# Altium PCB mdm3.PcbDoc (part 2 of 3)
Units mil, origin at the board's own origin, x right, y up, seen from the top; angles counter-clockwise.
Board outline 3925 x 3925 mil, 2 copper layers (TopLayer, BottomLayer); 80 components, 90 nets, 713 pads, 10 vias.
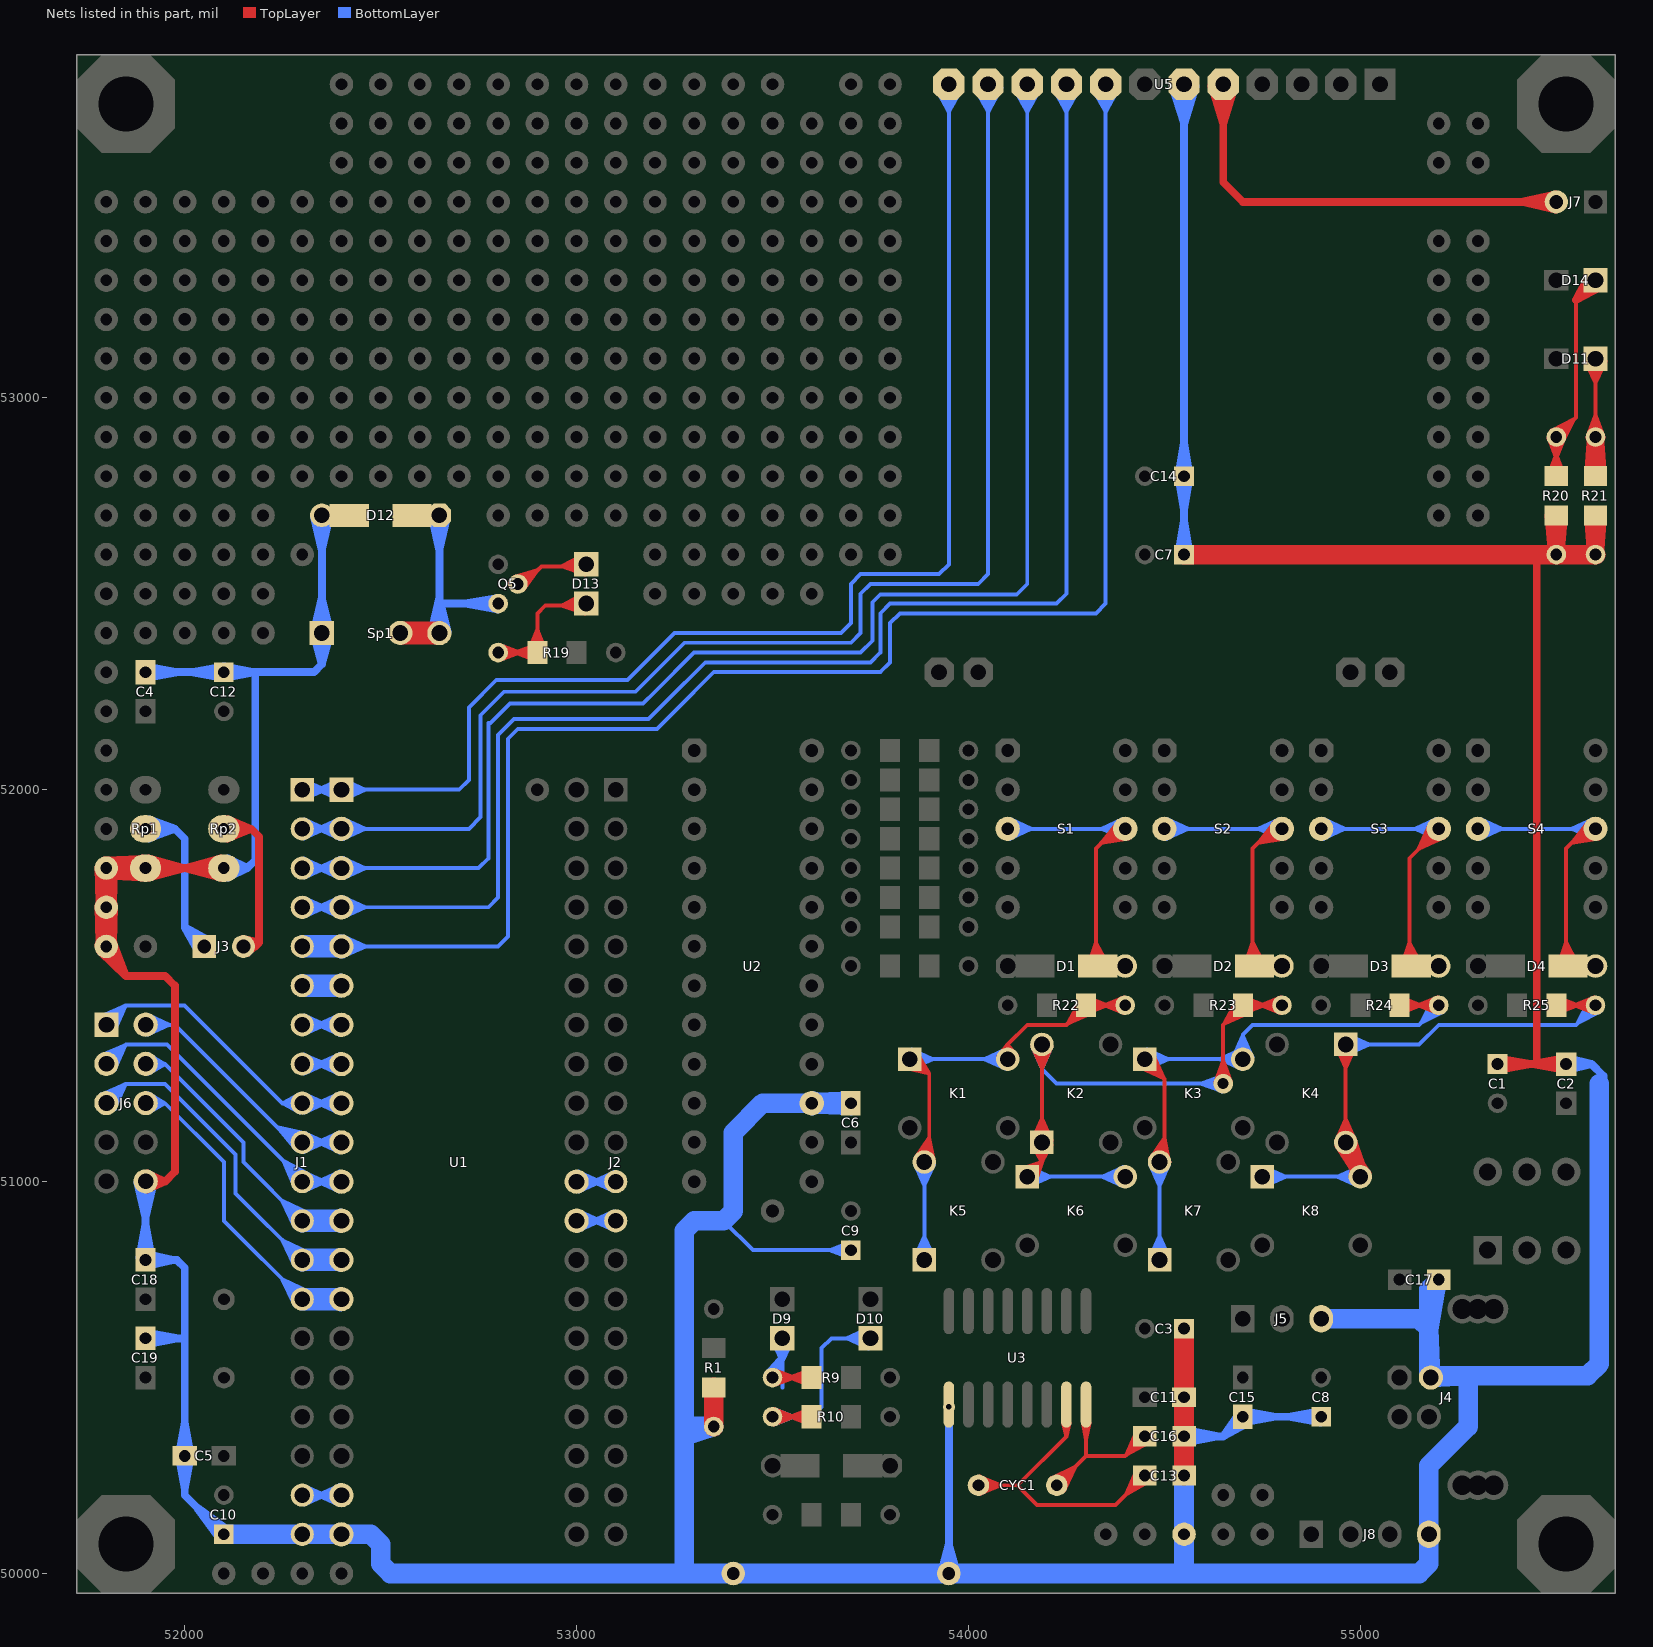
[diagram p2: the nets of this part, all layers, seen from the top]

## Via types
v1: diameter 30, hole 14, TopLayer to BottomLayer, 5 vias
v2: diameter 50, hole 28, TopLayer to BottomLayer, 5 vias

## Nets (pads, with @x,y where several pads share a name; then routed paths per layer and width w, separated by ;. In a path a pad name is that pad's centre, name@x,y a point inside that pad or via, vN(x,y) a via of type N, cw(c..) or ccw(c..) an arc to the next point about the centre after c; other vN are vias at no path point) (continued)
GND: C1.1 C2.2 C3.1 C4.2 C5.2 C6.2 C7.2 C8.1 C9.1 C10.1 C11.2 C12.1 C13.2 C14.1 C15.2 C16.2 C17.2 C18.2 C19.2 D12.2 D12.4 J1.20 J4.4 J5.3 J6.10 J8.4 pad.0@51800,51600 pad.0@53400,50000 pad.0@54550,50100 pad.1@51800,51700 pad.1@53950,50000 pad.2@51800,51800 R1.2 R1.4 R20.1 R20.3 R21.1 R21.3 Rp1.3 Rp2.3 Sp1.1 U1.20 U2.15 U3.1 U5.6 | length 29667.9
  TopLayer w20: pad.0@51780.12,51602.22 51800,51690 pad.0@51819.88,51602.22 ; pad.1@51780.12,51697.78 51800,51610 pad.1@51819.88,51697.78 ; pad.1@51780.08,51701.75 pad.0@51782.13,51611.09 ; pad.1@51780.12,51702.22 51800,51790 pad.1@51819.88,51702.22 ; pad.2@51780.12,51797.78 51800,51710 pad.2@51819.88,51797.78 ; pad.2@51780.08,51801.75 pad.1@51782.13,51711.09 ; pad.1@51780.95,51693.92 pad.0@51817.87,51611.09 ; pad.2@51780.95,51793.92 pad.1@51817.87,51711.09 ; pad.0@51784.69,51587.13 51850,51525 ; pad.2@51796.93,51780.24 51887.92,51776.24 pad.2@51807.31,51818.62 ; pad.2@51796.93,51819.76 51887.92,51823.76 pad.2@51807.31,51781.38 ; pad.0@51817.77,51609.18 51850,51525 ; pad.1@51819.05,51693.92 pad.0@51782.13,51611.09 ; pad.2@51819.05,51793.92 pad.1@51782.13,51711.09 ; pad.1@51819.92,51701.75 pad.0@51817.87,51611.09 ; pad.2@51819.92,51801.75 pad.1@51817.87,51711.09 ; Rp1.3@51891.71,51775.22 pad.2@51800,51800 ; Rp1.3@51891.71,51824.78 pad.2@51800,51800 ; Rp1.3@51895,51800 pad.2@51800,51800 ; J6.10@51900.29,51000.5 51950.5,51000.5 ; J6.10@51904.68,50979.96 51950.5,51000.5 ; J6.10@51904.68,51021.04 51950.5,51000.5 ; Rp1.3@51905,51800 52000,51800 ; Rp1.3@51908.29,51775.22 52000,51800 ; Rp1.3@51908.29,51824.78 52000,51800 ; 51975,51025 51950.5,51000.5 ; 51975,51030 51975,51500 51950,51525 51850,51525 ; Rp2.3@52091.71,51775.22 52000,51800 ; Rp2.3@52091.71,51824.78 52000,51800 ; Rp2.3@52095,51800 52000,51800 ; Rp2.3@52100,51800 Rp1.3@51900,51800 pad.2@51800,51800 ; C1.1@55351.32,51285.06 55435,51300 C1.1@55351.32,51314.94 ; 55375,51300 C1.1@55350,51300 C2.2@55525,51300 ; 55450,51300 55450,52600 ; R20.3@55480.47,52700.15 R20.1@55487.47,52614.83 ; R20.3@55484.47,52698.58 55500,52614.41 R20.3@55515.53,52698.58 ; R20.1@55485.06,52601.32 55500,52685 R20.1@55514.94,52601.32 ; R20.3@55488.63,52697.03 R20.1@55512.53,52614.83 ; R20.3@55496.06,52700 R20.1@55487.47,52614.83 ; R20.1@55500,52600 R20.3@55500,52700 ; R20.3@55503.94,52700 R20.1@55512.53,52614.83 ; R20.3@55511.37,52697.03 R20.1@55487.47,52614.83 ; R20.3@55519.53,52700.15 R20.1@55512.53,52614.83 ; C2.2@55523.51,51284.07 55439,51300 C2.2@55523.51,51315.93 ; R21.3@55580.47,52700.15 R21.1@55587.47,52614.83 ; R21.3@55584.47,52698.58 55600,52614.41 R21.3@55615.53,52698.58 ; R21.1@55585.06,52601.32 55600,52685 R21.1@55614.94,52601.32 ; R21.3@55588.63,52697.03 R21.1@55612.53,52614.83 ; R21.3@55596.06,52700 R21.1@55587.47,52614.83 ; R21.1@55600,52600 R21.3@55600,52700 ; R21.3@55603.94,52700 R21.1@55612.53,52614.83 ; R21.3@55611.37,52697.03 R21.1@55587.47,52614.83 ; R21.3@55619.53,52700.15 R21.1@55612.53,52614.83 ; pad.0@51782.13,51611.09 pad.1@51800,51700 ; pad.1@51782.13,51711.09 pad.2@51800,51800 ; pad.0@51800,51600 51850,51525 ; pad.0@51800,51600 pad.1@51800,51700 ; pad.0@51800,51600 51800,51575 51850,51525 ; pad.1@51800,51700 pad.0@51817.87,51611.09 ; pad.1@51800,51700 pad.2@51800,51800 ; pad.2@51800,51800 pad.1@51817.87,51711.09 ; Rp1.3@51890,51800 51802.22,51780.12 Rp1.3@51890,51800 ; Rp1.3@51890,51800 51802.22,51819.88 Rp1.3@51890,51800
  TopLayer w50: R1.2@53350,50375 R1.4@53350,50475 ; C13.2@54550,50250 C16.2@54550,50350 C11.2@54550,50450 C3.1@54550,50625 ; C7.2@54550,52600 R20.1@55500,52600 R21.1@55600,52600
  BottomLayer w10: 53375,50900 53450,50825 C9.1@53700,50825 ; C9.1@53696.36,50805.33 53645,50825 ; C9.1@53696.36,50844.67 53645,50825 ; C9.1@53699.09,50815.04 53645,50825 ; C9.1@53699.09,50834.96 53645,50825
  BottomLayer w20: J6.10@51879.42,50998.14 51900,50909.5 ; C18.2@51884.07,50805.49 51900,50890 ; C19.2@51900,50600 52000,50600 ; C18.2@51900,50804 51900,50890 ; J6.10@51900,51000 C18.2@51900,50800 51970,50800 ; C4.2@51900,52300 C12.1@52100,52300 52180,52300 ; J6.10@51900.29,51000.5 51900,50909.5 ; C4.2@51901.32,52285.06 51985,52300 C4.2@51901.32,52314.94 ; C19.2@51901.49,50584.07 51986,50600 C19.2@51901.49,50615.93 ; C18.2@51901.83,50784.1 51970,50800 ; C18.2@51901.83,50815.9 51970,50800 ; C18.2@51915.93,50805.49 51900,50890 ; J6.10@51921.14,50998.01 51900,50909.5 ; C5.2@51985.06,50298.68 52000,50215 C5.2@52014.94,50298.68 ; C5.2@51985.06,50301.32 52000,50385 C5.2@52014.94,50301.32 ; C10.1@52088.59,50090.26 52032.57,50167.43 ; C12.1@52098.68,52285.06 52015,52300 C12.1@52098.68,52314.94 ; Rp2.3@52100,51800 52160,51800 ; C12.1@52101.41,52285.07 52180,52300 ; C12.1@52101.41,52314.93 52180,52300 ; Rp2.3@52105,51800 52160,51800 ; C10.1@52109.74,50111.41 52032.57,50167.43 ; Rp2.3@52110.68,51775.65 52160,51800 ; Rp2.3@52110.68,51824.35 52160,51800 ; Sp1.1@52329.22,52402.07 52350,52490.67 ; Sp1.1@52329.27,52396.92 52350,52320 ; D12.2@52330.12,52697.78 52350,52610 ; D12.2@52369.88,52697.78 52350,52610 ; Sp1.1@52370.9,52396.88 52350,52320 ; Sp1.1@52370.94,52402.11 52350,52490.67 ; U2.15@53600,51200 C6.2@53700,51200 ; U2.15@53602.42,51179.14 53691,51200 U2.15@53602.42,51220.86 ; C6.2@53696.63,51191.38 U2.15@53616.18,51217.62 ; C6.2@53696.63,51208.62 U2.15@53616.18,51182.38 ; C6.2@53698.68,51185.06 53615,51200 C6.2@53698.68,51214.94 ; C6.2@53700,51194 U2.15@53616.18,51182.38 ; C6.2@53700,51206 U2.15@53616.18,51217.62 ; C6.2@53700.73,51179.02 U2.15@53616.18,51182.38 ; C6.2@53700.73,51220.98 U2.15@53616.18,51217.62 ; pad.1@53930.18,50002.67 53950,50075 ; pad.1@53950,50000 53950,50075 ; v1(53950,50425) 53950,50075 ; pad.1@53969.82,50002.67 53950,50075 ; U5.6@54520.34,53795.5 54550,53700 U5.6@54579.66,53795.5 ; C7.2@54535.06,52601.32 54550,52685 ; C14.1@54535.06,52798.68 54550,52715 C14.1@54564.94,52798.68 ; C14.1@54535.06,52801.32 54550,52885 C14.1@54564.94,52801.32 ; C16.2@54550,50350 54650,50350 ; U5.6@54550,53800 C7.2@54550,52600 54550,52685 ; C16.2@54554,50350 54640,50350 ; C16.2@54555.49,50334.07 54640,50350 ; C16.2@54555.49,50365.93 54640,50350 ; C7.2@54564.94,52601.32 54550,52685 ; C15.2@54688.89,50404.07 54650,50350 ; C15.2@54700,50394 54650,50350 ; C15.2@54701.32,50385.06 54785,50400 C15.2@54701.32,50414.94 ; C15.2@54708.58,50381.7 54650,50350 ; C8.1@54898.68,50385.06 54815,50400 C8.1@54898.68,50414.94 ; C8.1@54900,50400 C15.2@54700,50400 54650,50350 ; C2.2@55525,51300 55590,51300 ; C2.2@55526.97,51284.12 55590,51300 ; C2.2@55526.97,51315.88 55590,51300 ; 55610,51250 55620,51260 55620,51270 55590,51300 ; 51970,50800 51980,50800 52000,50780 52000,50600 ; 52000,50600 C5.2@52000,50300 52000,50200 C10.1@52100,50100 52032.57,50167.43 ; 52160,51800 52180,51820 52180,52300 ; 52180,52300 52330,52300 52350,52320 ; 52350,52320 Sp1.1@52350.09,52399.67 52350,52490.67 ; 52350,52320 D12.2@52350,52700 52350,52610
  BottomLayer w50: C10.1@52100,50100 J1.20@52300,50100 U1.20@52400,50100 52475,50100 52500,50075 52500,50025 52525,50000 53000,50000 ; 52875,50000 53000,50000 ; pad.0@53375,50000 53275,50000 ; C13.2@54550,50250 54550,50000 ; J5.3@54900,50650 55150,50650 55175,50625 ; J8.4@55175,50095 55175,50025 ; J8.4@55175,50105 55175,50275 ; C17.2@55196,50750 55175,50625 ; C17.2@55200,50750 55175,50725 55175,50625 ; 55610,51250 55610,50535 55580,50505 55275,50505 ; 53000,50000 53275,50000 ; 53275,50000 pad.0@53400,50000 ; 53275,50000 53275,50350 ; 53275,50000 pad.0@53400,50000 ; 53275,50350 R1.2@53350,50375 ; 53275,50350 53300,50375 ; 53275,50350 53275,50875 53300,50900 53375,50900 53400,50925 53400,51125 53475,51200 ; 53300,50375 R1.2@53350,50375 ; 53300,50375 R1.2@53350,50375 ; pad.0@53400,50000 pad.1@53950,50000 54550,50000 ; 53475,51200 U2.15@53600,51200 53475,51200 ; 54550,50000 55150,50000 55175,50025 ; 55175,50025 J8.4@55175,50100 55175,50275 ; 55175,50275 55275,50375 55275,50505 ; 55175,50625 J4.4@55180,50500 55275,50505 ; 55175,50625 55175,50505 55275,50505
LEDA: J7.2 U5.5 | length 1499.8
  TopLayer w20: U5.5@54620.34,53795.5 54650,53700 U5.5@54679.66,53795.5 ; U5.5@54650,53800 54650,53550 54700,53500 J7.2@55500,53500 ; J7.2@55497.87,53480.59 55410.47,53500 J7.2@55497.87,53519.41
NetC13_1: C13.1 CYC1.2 U3.7 | length 1390.7
  TopLayer w10: CYC1.2@54025.45,50225.14 54125,50225.14 ; CYC1.2@54026.81,50212.71 54082.95,50225.14 ; CYC1.2@54026.81,50237.57 54082.95,50225.14 ; CYC1.2@54029.85,50203.07 54082.95,50225.14 ; CYC1.2@54029.85,50247.21 54082.95,50225.14 ; U3.7@54241.56,50384.48 54250,50350 ; U3.7@54250,50385.5 54250,50350 ; U3.7@54250,50431 54250,50350 ; U3.7@54258.44,50384.48 54250,50350 ; C13.1@54428.39,50261.45 54402.79,50202.79 ; C13.1@54437.28,50256.7 54402.79,50202.79 ; C13.1@54446,50250 54402.79,50202.79 ; C13.1@54450,50250 54375,50175 54175,50175 54125,50225 54125,50225.14 ; C13.1@54453.45,50241.9 54402.79,50202.79 ; C13.1@54458.96,50233.47 54402.79,50202.79 ; 54125,50225.14 54125.14,50225.14 54250,50350
NetC16_1: C16.1 CYC1.1 U3.8 | length 1133.9
  TopLayer w10: CYC1.1@54212.35,50243.43 54274.16,50273.85 ; CYC1.1@54217.45,50234.74 54274.16,50273.85 ; CYC1.1@54225.59,50225 CYC1.1@54225.45,50225.14 54300,50299.69 ; CYC1.1@54235.05,50217.14 54274.16,50273.85 ; CYC1.1@54243.74,50212.04 54274.16,50273.85 ; U3.8@54291.54,50384.67 54300,50342 ; U3.8@54300,50385.5 54300,50342 ; U3.8@54300,50431 54300,50299.69 ; U3.8@54308.46,50384.67 54300,50342 ; C16.1@54428.39,50361.45 54402.79,50302.79 ; C16.1@54437.28,50356.7 54402.79,50302.79 ; C16.1@54446,50350 54402.79,50302.79 ; C16.1@54450,50350 54399.69,50299.69 54300,50299.69 ; C16.1@54453.45,50341.9 54402.79,50302.79 ; C16.1@54458.96,50333.47 54402.79,50302.79
NetD1_2: D1.2 D1.4 S1.3 S1.8 | length 2223.4
  TopLayer w10: D1.4@54305.66,51552.99 54325,51609.94 ; D1.4@54315.48,51550.55 54325,51609.94 ; D1.4@54325,51555 54325,51850 54375,51900 S1.8@54400,51900 54338.57,51863.57 ; D1.4@54330,51550 54325,51609.94 ; D1.4@54344.23,51552.95 54325,51609.94 ; D1.4@54353.51,51556.98 54325,51609.94 ; S1.8@54382.89,51919.58 54338.57,51863.57 ; S1.8@54390.35,51912.76 54338.57,51863.57 ; S1.8@54396.73,51905.03 54338.57,51863.57 ; S1.8@54402.84,51894.72 54338.57,51863.57 ; S1.8@54406.57,51885.41 54338.57,51863.57 ; S1.8@54408.97,51875.6 54338.57,51863.57
  BottomLayer w10: S1.3@54100,51900 S1.8@54400,51900 ; S1.3@54100.3,51894.01 54161,51900 ; S1.3@54100.3,51905.99 54161,51900 ; S1.3@54102.1,51884.14 54161,51900 ; S1.3@54102.1,51915.86 54161,51900 ; S1.3@54105.54,51874.6 54161,51900 ; S1.3@54105.54,51925.4 54161,51900 ; S1.8@54394.46,51874.6 54339,51900 ; S1.8@54394.46,51925.4 54339,51900 ; S1.8@54397.9,51884.14 54339,51900 ; S1.8@54397.9,51915.86 54339,51900 ; S1.8@54399.7,51894.01 54339,51900 ; S1.8@54399.7,51905.99 54339,51900
NetD2_2: D2.2 D2.4 S2.3 S2.8 | length 2230.5
  TopLayer w10: D2.4@54705.66,51552.99 54725,51609.94 ; D2.4@54715.48,51550.55 54725,51609.94 ; D2.4@54744.23,51552.95 54725,51609.94 ; D2.4@54753.51,51556.98 54725,51609.94 ; S2.8@54782.89,51919.58 54738.57,51863.57 ; S2.8@54790.35,51912.76 54738.57,51863.57 ; S2.8@54796.73,51905.03 54738.57,51863.57 ; S2.8@54802.84,51894.72 54738.57,51863.57 ; S2.8@54806.57,51885.41 54738.57,51863.57 ; S2.8@54808.97,51875.6 54738.57,51863.57 ; 54725,51609.94 D2.4@54730,51550 54725,51555 54725,51850 54775,51900 S2.8@54800,51900 54738.57,51863.57
  BottomLayer w10: S2.3@54500,51900 S2.8@54800,51900 ; S2.3@54500.3,51894.01 54561,51900 ; S2.3@54500.3,51905.99 54561,51900 ; S2.3@54502.1,51884.14 54561,51900 ; S2.3@54502.1,51915.86 54561,51900 ; S2.3@54505.54,51874.6 54561,51900 ; S2.3@54505.54,51925.4 54561,51900 ; S2.8@54794.46,51874.6 54739,51900 ; S2.8@54794.46,51925.4 54739,51900 ; S2.8@54797.9,51884.14 54739,51900 ; S2.8@54797.9,51915.86 54739,51900 ; S2.8@54799.7,51894.01 54739,51900 ; S2.8@54799.7,51905.99 54739,51900
NetD3_2: D3.2 D3.4 S3.3 S3.8 | length 3257.6
  TopLayer w10: D3.4@55105.66,51552.99 55125,51609.93 ; D3.4@55115.48,51550.55 55125,51609.93 ; D3.4@55125,51555 55125,51825 S3.8@55200,51900 55147.79,51847.79 ; D3.4@55130,51550 55125,51609.93 ; D3.4@55144.23,51552.95 55125,51609.93 ; D3.4@55153.51,51556.98 55125,51609.93 ; S3.8@55178.67,51914.86 55147.79,51847.79 ; S3.8@55187.53,51910.02 55147.79,51847.79 ; S3.8@55195.59,51904.07 55147.79,51847.79 ; S3.8@55204.07,51895.59 55147.79,51847.79 ; S3.8@55210.02,51887.53 55147.79,51847.79 ; S3.8@55214.86,51878.67 55147.79,51847.79
  BottomLayer w10: 54961,51900 54900.3,51894.01 54961,51900 ; 54961,51900 54900.3,51905.99 54961,51900 ; 54961,51900 54902.1,51884.14 54961,51900 ; 54961,51900 54902.1,51915.86 54961,51900 ; 54961,51900 54905.54,51874.6 54961,51900 ; 54961,51900 54905.54,51925.4 54961,51900 ; 55139,51900 55199.7,51905.99 55139,51900 ; 55139,51900 55199.7,51894.01 55139,51900 ; 55139,51900 55197.9,51915.86 55139,51900 ; 55139,51900 55197.9,51884.14 55139,51900 ; 55139,51900 55194.46,51925.4 55139,51900 ; 55139,51900 55194.46,51874.6 55139,51900 ; S3.3@54900,51900 S3.8@55200,51900 S3.3@54900,51900
NetD4_2: D4.2 D4.4 S4.3 S4.8 | length 2205.5
  TopLayer w10: D4.4@55505.66,51552.99 55525,51609.94 ; D4.4@55515.48,51550.55 55525,51609.94 ; D4.4@55544.23,51552.95 55525,51609.94 ; D4.4@55553.51,51556.98 55525,51609.94 ; S4.8@55575,51900 55525,51850 55525,51555 D4.4@55530,51550 55525,51609.94 ; S4.8@55582.89,51919.58 55538.57,51863.57 ; S4.8@55590.35,51912.76 55538.57,51863.57 ; S4.8@55596.73,51905.03 55538.57,51863.57 ; S4.8@55600,51900 55538.57,51863.57 ; S4.8@55602.84,51894.72 55538.57,51863.57 ; S4.8@55606.57,51885.41 55538.57,51863.57 ; S4.8@55608.97,51875.6 55538.57,51863.57
  BottomLayer w10: S4.3@55300,51900 S4.8@55600,51900 ; S4.3@55300.3,51894.01 55361,51900 ; S4.3@55300.3,51905.99 55361,51900 ; S4.3@55302.1,51884.14 55361,51900 ; S4.3@55302.1,51915.86 55361,51900 ; S4.3@55305.54,51874.6 55361,51900 ; S4.3@55305.54,51925.4 55361,51900 ; S4.8@55594.46,51874.6 55539,51900 ; S4.8@55594.46,51925.4 55539,51900 ; S4.8@55597.9,51884.14 55539,51900 ; S4.8@55597.9,51915.86 55539,51900 ; S4.8@55599.7,51894.01 55539,51900 ; S4.8@55599.7,51905.99 55539,51900
NetD9_2: D9.2 R9.1 R9.3 | length 1351
  TopLayer w10: R9.1@53500,50500 R9.3@53600,50500 ; R9.1@53500.91,50490.04 53555,50500 ; R9.1@53500.91,50509.96 53555,50500 ; R9.1@53503.64,50480.33 53555,50500 ; R9.1@53503.64,50519.67 53555,50500 ; R9.3@53596.19,50479.77 53544.41,50500 ; R9.3@53596.19,50520.23 53544.41,50500 ; R9.3@53598.99,50489.46 53544.41,50500 ; R9.3@53598.99,50510.54 53544.41,50500
  BottomLayer w10: R9.1@53483.08,50510.67 53525,50558.4 ; R9.1@53491.15,50504.65 53525,50558.4 ; D9.2@53499.6,50594.46 53525,50539 ; R9.1@53500,50500 53525,50558.4 ; D9.2@53509.14,50597.9 53525,50539 ; R9.1@53509.47,50496.8 53525,50558.4 ; D9.2@53519.01,50599.7 53525,50539 ; R9.1@53519.4,50495.12 53525,50558.4 ; 53525,50475 D9.2@53525,50600 ; D9.2@53530.99,50599.7 53525,50539 ; D9.2@53540.86,50597.9 53525,50539 ; D9.2@53550.4,50594.46 53525,50539
NetD10_2: D10.2 R10.2 R10.4 | length 1549.1
  TopLayer w10: R10.2@53500,50400 R10.4@53600,50400 ; R10.2@53500.91,50390.04 53555,50400 ; R10.2@53500.91,50409.96 53555,50400 ; R10.2@53503.64,50380.33 53555,50400 ; R10.2@53503.64,50419.67 53555,50400 ; R10.4@53596.19,50379.77 53544.41,50400 ; R10.4@53596.19,50420.23 53544.41,50400 ; R10.4@53598.99,50389.46 53544.41,50400 ; R10.4@53598.99,50410.54 53544.41,50400
  BottomLayer w10: R10.2@53500,50400 53600,50400 53625,50425 53625,50575 53650,50600 D10.2@53750,50600 ; R10.2@53500.91,50390.04 53555,50400 ; R10.2@53500.91,50409.96 53555,50400 ; R10.2@53503.64,50380.33 53555,50400 ; R10.2@53503.64,50419.67 53555,50400 ; D10.2@53744.46,50574.6 53689,50600 ; D10.2@53744.46,50625.4 53689,50600 ; D10.2@53747.9,50584.14 53689,50600 ; D10.2@53747.9,50615.86 53689,50600 ; D10.2@53749.7,50594.01 53689,50600 ; D10.2@53749.7,50605.99 53689,50600
NetD11_2: D11.2 R21.2 R21.4 | length 1740.8
  TopLayer w10: D11.2@55574.6,53094.46 55600,53039 ; R21.2@55580.33,52903.64 55600,52955 ; D11.2@55584.14,53097.9 55600,53039 ; R21.2@55590.04,52900.91 55600,52955 ; D11.2@55594.01,53099.7 55600,53039 ; R21.2@55600,52900 D11.2@55600,53100 ; D11.2@55605.99,53099.7 55600,53039 ; R21.2@55609.96,52900.91 55600,52955 ; D11.2@55615.86,53097.9 55600,53039 ; R21.2@55619.67,52903.64 55600,52955 ; D11.2@55625.4,53094.46 55600,53039
  TopLayer w20: R21.4@55580.47,52799.85 R21.2@55587.47,52885.17 ; R21.4@55584.47,52801.42 55600,52885.59 R21.4@55615.53,52801.42 ; R21.2@55585.06,52898.68 55600,52815 R21.2@55614.94,52898.68 ; R21.4@55588.63,52802.97 R21.2@55612.53,52885.17 ; R21.4@55596.06,52800 R21.2@55587.47,52885.17 ; R21.4@55600,52800 R21.2@55600,52900 ; R21.4@55603.94,52800 R21.2@55612.53,52885.17 ; R21.4@55611.37,52802.97 R21.2@55587.47,52885.17 ; R21.4@55619.53,52799.85 R21.2@55612.53,52885.17
NetD12_1: D12.1 D12.3 Q5.3 Sp1.2 Sp1.3 | length 2447.2
  TopLayer w20: Sp1.2@52552.35,52379.13 Sp1.3@52641,52399.67 ; Sp1.2@52552.5,52420.85 Sp1.3@52641,52399.67 ; Sp1.3@52643.35,52379.78 Sp1.2@52560.35,52418.97 ; Sp1.3@52643.48,52419.6 Sp1.2@52560.28,52380.97 ; Sp1.3@52647.6,52378.82 Sp1.2@52559.09,52399.97 ; Sp1.3@52647.66,52378.81 52559.09,52399.67 Sp1.3@52647.66,52420.53 ; Sp1.3@52647.73,52420.54 Sp1.2@52559.09,52399.97 ; D12.1@52650,52700 D12.1@52650.09,52699.91 ; Sp1.3@52651.99,52378.76 Sp1.2@52560.28,52380.97 ; Sp1.3@52652.13,52420.57 Sp1.2@52560.35,52418.97 ; Sp1.2@52559.09,52399.97 Sp1.3@52650.09,52399.67 ; Sp1.2@52560.28,52380.97 Sp1.3@52650.09,52399.67 ; Sp1.2@52560.35,52418.97 Sp1.3@52650.09,52399.67 ; Sp1.3@52641,52399.67 Sp1.2@52550,52400 52550.33,52399.67 Sp1.3@52650.09,52399.67
  BottomLayer w20: Sp1.3@52629.22,52402.07 52650,52490.67 ; D12.1@52630.12,52697.78 52650,52610 D12.1@52669.88,52697.78 ; Sp1.3@52650,52399.76 D12.1@52650,52700 ; Sp1.3@52650.09,52399.67 52650,52490.67 ; 52655,52475 Q5.3@52800,52475 ; Sp1.3@52670.94,52402.11 52650,52490.67 ; Q5.3@52798.68,52460.06 52715,52475 Q5.3@52798.68,52489.94
NetD13_1: D13.1 Q5.2 | length 947.9
  TopLayer w10: Q5.2@52841.16,52542.94 52901.56,52561.56 ; Q5.2@52844.88,52533.59 52901.56,52561.56 ; Q5.2@52850,52525 52901.56,52561.56 ; Q5.2@52856.41,52517.33 52901.56,52561.56 ; Q5.2@52864,52510.72 52901.56,52561.56 ; Q5.2@52870,52530 52910,52570 52995,52570 D13.1@53025,52600 ; D13.1@53017.74,52599.97 52961.21,52570 ; D13.1@53021.72,52549.21 52961.21,52570 ; D13.1@53021.77,52590.67 52961.21,52570 ; D13.1@53024.25,52559.02 52961.21,52570 ; D13.1@53024.25,52580.95 52961.21,52570 ; D13.1@53025,52575 52961.21,52570 ; D13.1@53025.19,52569 52961.21,52570
NetD13_2: D13.2 R19.1 R19.3 | length 1488
  TopLayer w10: R19.1@52800,52350 R19.3@52900,52350 ; R19.1@52800.91,52340.04 52855,52350 ; R19.1@52800.91,52359.96 52855,52350 ; R19.1@52803.64,52330.33 52855,52350 ; R19.1@52803.64,52369.67 52855,52350 ; R19.3@52879.77,52357.75 52900,52409.53 ; R19.3@52889.46,52354.95 52900,52409.53 ; R19.3@52896.19,52329.77 52844.41,52350 ; R19.3@52896.19,52370.23 52844.41,52350 ; R19.3@52898.99,52339.46 52844.41,52350 ; R19.3@52898.99,52360.54 52844.41,52350 ; R19.3@52900,52353.94 52900,52409.53 ; R19.3@52900,52375 52900,52450 52920,52470 52995,52470 D13.2@53025,52500 ; R19.3@52910.54,52354.95 52900,52409.53 ; R19.3@52920.23,52357.75 52900,52409.53 ; D13.2@53017.73,52499.96 52961.34,52470 ; D13.2@53021.72,52449.21 52961.34,52470 ; D13.2@53021.76,52490.67 52961.34,52470 ; D13.2@53024.24,52459.02 52961.34,52470 ; D13.2@53024.25,52480.95 52961.34,52470 ; D13.2@53025,52475 52961.34,52470 ; D13.2@53025.19,52469 52961.34,52470
NetD14_2: D14.2 R20.2 R20.4 | length 1457.3
  TopLayer w10: R20.4@55479.77,52803.81 55500,52855.59 ; R20.2@55480.33,52896.36 55500,52845 ; R20.2@55488.19,52916.14 55546.21,52946.21 ; R20.4@55489.46,52801.01 55500,52855.59 ; R20.2@55490.04,52899.09 55500,52845 ; R20.2@55493.49,52907.59 55546.21,52946.21 ; R20.4@55500,52800 R20.2@55500,52900 55550,52950 55550,53250 ; R20.2@55507.59,52893.49 55546.21,52946.21 ; R20.2@55509.96,52899.09 55500,52845 ; R20.4@55510.54,52801.01 55500,52855.59 ; R20.2@55516.14,52888.19 55546.21,52946.21 ; R20.2@55519.67,52896.36 55500,52845 ; R20.4@55520.23,52803.81 55500,52855.59
  TopLayer w20: D14.2@55583.11,53312.48 55550,53250 ; D14.2@55612.48,53283.11 55550,53250 ; 55550,53250 D14.2@55600,53300 55550,53250
NetJ1_19: J1.19 U1.19 | length 704.1
  BottomLayer w10: J1.19@52300,50200 U1.19@52400,50200 ; J1.19@52301.77,50185.58 52359.53,50200 ; J1.19@52301.77,50214.42 52359.53,50200 ; J1.19@52305.05,50176 52359.53,50200 ; J1.19@52305.05,50224 52359.53,50200 ; U1.19@52394.46,50174.6 52339,50200 ; U1.19@52394.46,50225.4 52339,50200 ; U1.19@52397.9,50184.14 52339,50200 ; U1.19@52397.9,50215.86 52339,50200 ; U1.19@52399.7,50194.01 52339,50200 ; U1.19@52399.7,50205.99 52339,50200
NetJ2_11: J2.11 U1.30 | length 704.1
  BottomLayer w10: U1.30@53000,51000 J2.11@53100,51000 ; U1.30@53000.3,50994.01 53061,51000 ; U1.30@53000.3,51005.99 53061,51000 ; U1.30@53002.1,50984.14 53061,51000 ; U1.30@53002.1,51015.86 53061,51000 ; U1.30@53005.54,50974.6 53061,51000 ; U1.30@53005.54,51025.4 53061,51000 ; J2.11@53094.95,50976 53040.47,51000 ; J2.11@53094.95,51024 53040.47,51000 ; J2.11@53098.23,50985.58 53040.47,51000 ; J2.11@53098.23,51014.42 53040.47,51000
NetJ2_12: J2.12 U1.29 | length 704.1
  BottomLayer w10: U1.29@53000,50900 J2.12@53100,50900 ; U1.29@53000.3,50894.01 53061,50900 ; U1.29@53000.3,50905.99 53061,50900 ; U1.29@53002.1,50884.14 53061,50900 ; U1.29@53002.1,50915.86 53061,50900 ; U1.29@53005.54,50874.6 53061,50900 ; U1.29@53005.54,50925.4 53061,50900 ; J2.12@53094.95,50876 53040.47,50900 ; J2.12@53094.95,50924 53040.47,50900 ; J2.12@53098.23,50885.58 53040.47,50900 ; J2.12@53098.23,50914.42 53040.47,50900
NetJ3_1: J3.1 Rp1.2 | length 757.5
  BottomLayer w20: Rp1.2@51900,51900 51975,51900 ; Rp1.2@51905,51900 51975,51900 ; Rp1.2@51909.46,51875.4 51975,51900 ; Rp1.2@51909.46,51924.6 51975,51900 ; J3.1@52034.42,51588.23 52000,51650 ; J3.1@52050,51600 52000,51650 ; J3.1@52061.77,51615.58 52000,51650 ; 51975,51900 52000,51875 52000,51650
NetJ3_2: J3.2 Rp2.2 | length 701.1
  TopLayer w20: Rp2.2@52100,51900 52170,51900 ; Rp2.2@52105,51900 52170,51900 ; Rp2.2@52109.81,51875.47 52170,51900 ; Rp2.2@52109.81,51924.53 52170,51900 ; J3.2@52149.88,51619.53 52190,51610 ; J3.2@52150,51600 52190,51610 ; J3.2@52159.09,51582.72 52190,51610 ; 52180,51600 52190,51610 ; 52170,51900 52190,51880 52190,51610
NetK1_1: K1.1 K1.4 K5.1 K5.4 R22.2 R22.4 | length 3667.4
  TopLayer w10: K1.1@53839.3,51289.9 53900,51275 ; K1.1@53842.5,51299.51 53900,51275 ; K1.1@53860.38,51323.33 53900,51275 ; K5.4@53864.46,51059.7 53900,51111.9 ; K1.1@53868.7,51329.1 53900,51275 ; K5.4@53873.25,51054.69 53900,51111.9 ; K5.4@53887.5,51050 53900,51111.9 ; K5.4@53900,51050 53900,51275 ; K5.4@53902.45,51048.8 53900,51111.9 ; K5.4@53912.5,51050 53900,51111.9 ; K1.4@54076.43,51320.83 54100,51350 ; K1.4@54085.3,51315.5 54100,51350 ; K1.4@54100,51312.5 54100,51350 ; K1.4@54114.7,51315.5 54100,51350 ; K1.4@54123.57,51320.83 54100,51350 ; R22.4@54283.81,51458.79 54253.2,51403.2 ; R22.4@54292.22,51453.25 54253.2,51403.2 ; R22.4@54300,51446.06 54253.2,51403.2 ; R22.4@54301.01,51439.46 54355.59,51450 ; R22.4@54301.01,51460.54 54355.59,51450 ; R22.4@54303.81,51429.77 54355.59,51450 ; R22.4@54303.81,51470.23 54355.59,51450 ; R22.4@54306.48,51437.68 54253.2,51403.2 ; R22.4@54311.26,51428.82 54253.2,51403.2 ; R22.2@54396.36,51430.33 54345,51450 ; R22.2@54396.36,51469.67 54345,51450 ; R22.2@54399.09,51440.04 54345,51450 ; R22.2@54399.09,51459.96 54345,51450 ; R22.2@54400,51450 R22.4@54300,51450 54250,51400 54150,51400 54100,51350 ; 53900,51275 K1.1@53850,51312.5 53862.5,51312.5 53900,51275
  BottomLayer w10: K1.1@53850,51312.5 K1.4@54100,51312.5 ; K1.1@53851.88,51297.62 53910,51312.5 ; K1.1@53851.88,51327.38 53910,51312.5 ; K1.1@53855.21,51288.05 53910,51312.5 ; K1.1@53855.21,51336.95 53910,51312.5 ; K5.1@53863.05,50805.21 53887.5,50860 ; K5.4@53863.05,51044.79 53887.5,50990 ; K5.1@53872.62,50801.88 53887.5,50860 ; K5.4@53872.62,51048.12 53887.5,50990 ; K5.1@53887.5,50800 K5.4@53887.5,51050 ; K5.1@53902.38,50801.88 53887.5,50860 ; K5.4@53902.38,51048.12 53887.5,50990 ; K5.1@53911.95,50805.21 53887.5,50860 ; K5.4@53911.95,51044.79 53887.5,50990 ; K1.4@54094.79,51288.05 54040,51312.5 ; K1.4@54094.79,51336.95 54040,51312.5 ; K1.4@54098.12,51297.62 54040,51312.5 ; K1.4@54098.12,51327.38 54040,51312.5
NetK2_1: K2.1 K2.4 K6.1 K6.4 R23.2 R23.4 | length 4308.1
  TopLayer w10: K6.1@54136.99,51033.85 54187.5,51050 ; K6.1@54141,51024.5 54187.5,51050 ; K6.1@54150,51012.5 54187.5,51050 ; K6.1@54162,51003.5 54187.5,51050 ; K2.1@54163.05,51105.21 54187.5,51160 ; K2.4@54163.05,51344.79 54187.5,51290 ; K2.1@54163.29,51093.75 54187.5,51050 ; K6.1@54171.35,50999.49 54187.5,51050 ; K2.1@54172.62,51101.88 54187.5,51160 ; K2.4@54172.62,51348.12 54187.5,51290 ; K2.1@54172.67,51097.75 54187.5,51050 ; K2.4@54187.5,51350 K2.1@54187.5,51100 54187.5,51050 ; K2.1@54202.33,51097.75 54187.5,51050 ; K2.1@54202.38,51101.88 54187.5,51160 ; K2.4@54202.38,51348.12 54187.5,51290 ; K2.1@54211.71,51093.75 54187.5,51050 ; K2.1@54211.95,51105.21 54187.5,51160 ; K2.4@54211.95,51344.79 54187.5,51290 ; v2@54630.29,51253.39 54650,51309 ; v2@54640.04,51250.85 54650,51309 ; v2(54650,51250) 54650,51400 R23.4@54700,51450 R23.2@54800,51450 ; v2@54659.96,51250.85 54650,51309 ; v2@54669.71,51253.39 54650,51309 ; R23.4@54683.81,51458.79 54653.2,51403.2 ; R23.4@54692.22,51453.25 54653.2,51403.2 ; R23.4@54700,51446.06 54653.2,51403.2 ; R23.4@54701.01,51439.46 54755.59,51450 ; R23.4@54701.01,51460.54 54755.59,51450 ; R23.4@54703.81,51429.77 54755.59,51450 ; R23.4@54703.81,51470.23 54755.59,51450 ; R23.4@54706.48,51437.68 54653.2,51403.2 ; R23.4@54711.26,51428.82 54653.2,51403.2 ; R23.2@54796.36,51430.33 54745,51450 ; R23.2@54796.36,51469.67 54745,51450 ; R23.2@54799.09,51440.04 54745,51450 ; R23.2@54799.09,51459.96 54745,51450
  BottomLayer w10: K6.1@54150,51012.5 K6.4@54400,51012.5 ; K6.1@54151.88,50997.62 54210,51012.5 ; K6.1@54151.88,51027.38 54210,51012.5 ; K6.1@54155.21,50988.05 54210,51012.5 ; K6.1@54155.21,51036.95 54210,51012.5 ; K2.4@54163.05,51344.79 54187.5,51290 ; K2.4@54172.62,51348.12 54187.5,51290 ; K2.4@54187.5,51350 54187.5,51287.5 54225,51250 v2(54650,51250) ; K2.4@54202.38,51348.12 54187.5,51290 ; K2.4@54211.95,51344.79 54187.5,51290 ; K6.4@54394.79,50988.05 54340,51012.5 ; K6.4@54394.79,51036.95 54340,51012.5 ; K6.4@54398.12,50997.62 54340,51012.5 ; K6.4@54398.12,51027.38 54340,51012.5 ; v2@54646.61,51230.29 54591,51250 ; v2@54646.61,51269.71 54591,51250 ; v2@54649.15,51240.04 54591,51250 ; v2@54649.15,51259.96 54591,51250
NetK3_1: K3.1 K3.4 K7.1 K7.4 R24.2 R24.4 | length 4048.1
  TopLayer w10: K3.1@54435.73,51291.98 54500,51262.5 ; K3.1@54440.58,51300.83 54500,51262.5 ; K3.1@54450,51312.5 54500,51262.5 ; K3.1@54461.67,51321.92 54500,51262.5 ; K7.4@54464.48,51059.74 54500,51111.61 ; K3.1@54470.52,51326.77 54500,51262.5 ; K7.4@54473.26,51054.71 54500,51111.61 ; K7.4@54487.5,51050 54500,51111.61 ; K7.4@54500,51045 54500,51262.5 ; K7.4@54502.45,51048.79 54500,51111.61 ; K7.4@54512.5,51050 54500,51111.61 ; R24.4@55100,51450 R24.2@55200,51450 ; R24.4@55101.01,51439.46 55155.59,51450 ; R24.4@55101.01,51460.54 55155.59,51450 ; R24.4@55103.81,51429.77 55155.59,51450 ; R24.4@55103.81,51470.23 55155.59,51450 ; R24.2@55196.36,51430.33 55145,51450 ; R24.2@55196.36,51469.67 55145,51450 ; R24.2@55199.09,51440.04 55145,51450 ; R24.2@55199.09,51459.96 55145,51450
  BottomLayer w10: K3.1@54450,51312.5 K3.4@54700,51312.5 54700,51375 54725,51400 55150,51400 R24.2@55200,51450 55153.79,51403.79 ; K3.1@54451.88,51297.62 54510,51312.5 ; K3.1@54451.88,51327.38 54510,51312.5 ; K3.1@54455.21,51288.05 54510,51312.5 ; K3.1@54455.21,51336.95 54510,51312.5 ; K7.1@54463.05,50805.21 54487.5,50860 ; K7.4@54463.05,51044.79 54487.5,50990 ; K7.1@54472.62,50801.88 54487.5,50860 ; K7.4@54472.62,51048.12 54487.5,50990 ; K7.1@54487.5,50800 K7.4@54487.5,51050 ; K7.1@54502.38,50801.88 54487.5,50860 ; K7.4@54502.38,51048.12 54487.5,50990 ; K7.1@54511.95,50805.21 54487.5,50860 ; K7.4@54511.95,51044.79 54487.5,50990 ; K3.4@54675.55,51317.71 54700,51372.5 ; K3.4@54685.12,51314.38 54700,51372.5 ; K3.4@54694.79,51288.05 54640,51312.5 ; K3.4@54694.79,51336.95 54640,51312.5 ; K3.4@54698.12,51297.62 54640,51312.5 ; K3.4@54698.12,51327.38 54640,51312.5 ; K3.4@54714.88,51314.38 54700,51372.5 ; K3.4@54724.45,51317.71 54700,51372.5 ; R24.2@55183.86,51461.81 55153.79,51403.79 ; R24.2@55192.41,51456.51 55153.79,51403.79 ; R24.2@55206.51,51442.41 55153.79,51403.79 ; R24.2@55211.81,51433.86 55153.79,51403.79
NetK4_1: K4.1 K4.4 K8.1 K8.4 R25.2 R25.4 | length 5663.3
  TopLayer w10: K4.4@54938.05,51105.21 54962.5,51160 ; K4.1@54938.05,51344.79 54962.5,51290 ; K4.4@54939.34,51090.59 K8.4@54977.65,51029.47 ; K4.4@54940.5,51088.13 K8.4@54985.06,51031.84 ; K4.4@54941.25,51086.82 54985,51040 ; K4.4@54942.57,51084.91 K8.4@54994.51,51037.02 ; K4.4@54944.89,51082.25 55002.1,51043.11 ; K4.4@54946.46,51080.83 55006.89,51046.57 ; K4.4@54947.62,51101.88 54962.5,51160 ; K4.1@54947.62,51348.12 54962.5,51290 ; K4.4@54948.24,51095.34 K8.4@54977.65,51029.47 ; K4.4@54948.83,51093.82 K8.4@54985.06,51031.84 ; K4.4@54949.17,51093.13 54985,51040 ; K4.4@54949.93,51091.82 K8.4@54994.51,51037.02 ; K4.4@54951.19,51090.15 55002.1,51043.11 ; K4.4@54952.06,51089.23 55006.89,51046.57 ; K4.1@54962.5,51350 K4.4@54962.5,51100 ; K8.4@54975.02,51011.57 54985,51079.53 ; K4.4@54975.01,51108.28 55006.89,51046.57 ; K4.4@54975.67,51107.19 55002.1,51043.11 ; K4.4@54976.52,51105.34 K8.4@54994.51,51037.02 ; K4.4@54977.06,51103.59 54985,51040 ; K4.4@54977.15,51103.2 K8.4@54985.06,51031.84 ; K4.4@54977.41,51101.61 K8.4@54977.65,51029.47 ; K4.4@54977.38,51101.88 54962.5,51160 ; K4.1@54977.38,51348.12 54962.5,51290 ; K4.4@54984.29,51112.25 55006.89,51046.57 ; K4.4@54985,51090 54985,51040 ; K8.4@54985.09,51010.84 54985,51079.53 ; K4.4@54985.26,51110.35 55002.1,51043.11 ; K4.4@54986.44,51107.21 K8.4@54994.51,51037.02 ; K4.4@54986.95,51105.21 54962.5,51160 ; K4.1@54986.95,51344.79 54962.5,51290 ; K4.4@54987.17,51104.04 54985,51040 ; K4.4@54987.24,51103.61 K8.4@54985.06,51031.84 ; K4.4@54987.48,51100.93 K8.4@54977.65,51029.47 ; K8.4@55000,51012.5 54985,51079.53 ; K8.4@55014.19,51017.35 54985,51079.53 ; K8.4@55023,51022.31 54985,51079.53 ; R25.4@55500,51450 R25.2@55600,51450 ; R25.4@55501.01,51439.46 55555.59,51450 ; R25.4@55501.01,51460.54 55555.59,51450 ; R25.4@55503.81,51429.77 55555.59,51450 ; R25.4@55503.81,51470.23 55555.59,51450 ; R25.2@55596.36,51430.33 55545,51450 ; R25.2@55596.36,51469.67 55545,51450 ; R25.2@55599.09,51440.04 55545,51450 ; R25.2@55599.09,51459.96 55545,51450 ; K4.4@54962.5,51100 K8.4@54994.51,51037.02 ; K4.4@54962.5,51100 55002.1,51043.11 ; K4.4@54962.5,51100 K8.4@54985.06,51031.84 ; K4.4@54962.5,51100 55006.89,51046.57 ; K4.4@54962.5,51100 K8.4@54977.65,51029.47 ; K4.4@54962.5,51100 54985,51040
  BottomLayer w10: K8.1@54750,51012.5 K8.4@55000,51012.5 ; K8.1@54751.88,50997.62 54810,51012.5 ; K8.1@54751.88,51027.38 54810,51012.5 ; K8.1@54755.21,50988.05 54810,51012.5 ; K8.1@54755.21,51036.95 54810,51012.5 ; K4.1@54962.5,51350 55150,51350 55200,51400 55250,51400 55550,51400 R25.2@55600,51450 ; K4.1@54964.38,51335.12 55022.5,51350 ; K4.1@54964.38,51364.88 55022.5,51350 ; K4.1@54967.71,51325.55 55022.5,51350 ; K4.1@54967.71,51374.45 55022.5,51350 ; K8.4@54994.79,50988.05 54940,51012.5 ; K8.4@54994.79,51036.95 54940,51012.5 ; K8.4@54998.12,50997.62 54940,51012.5 ; K8.4@54998.12,51027.38 54940,51012.5 ; R25.2@55583.86,51461.81 55553.79,51403.79 ; R25.2@55592.41,51456.51 55553.79,51403.79 ; R25.2@55606.51,51442.41 55553.79,51403.79 ; R25.2@55611.81,51433.86 55553.79,51403.79
P00: J1.1 U1.1 U5.12 | length 4670.2
  BottomLayer w10: J1.1@52300,52000 U1.1@52400,52000 52700,52000 52725,52025 52725,52210 52795,52280 53130,52280 53150,52300 53250,52400 53675,52400 53700,52425 53700,52525 53725,52550 53925,52550 53950,52575 53950,52650 U5.12@53950,53800 ; J1.1@52301.77,51985.58 52359.53,52000 ; J1.1@52301.77,52014.42 52359.53,52000 ; J1.1@52305.05,51976 52359.53,52000 ; J1.1@52305.05,52024 52359.53,52000 ; U1.1@52394.46,51974.6 52339,52000 ; U1.1@52394.46,52025.4 52339,52000 ; U1.1@52397.9,51984.14 52339,52000 ; U1.1@52397.9,52015.86 52339,52000 ; U1.1@52399.7,51994.01 52339,52000 ; U1.1@52399.7,52005.99 52339,52000 ; U1.1@52400.3,51994.01 52461,52000 ; U1.1@52400.3,52005.99 52461,52000 ; U1.1@52402.1,51984.14 52461,52000 ; U1.1@52402.1,52015.86 52461,52000 ; U1.1@52405.54,51974.6 52461,52000 ; U1.1@52405.54,52025.4 52461,52000 ; U5.12@53916.11,53791.25 53950,53730 ; U5.12@53925.4,53795.54 53950,53730 ; U5.12@53935.09,53798.39 53950,53730 ; U5.12@53964.91,53798.39 53950,53730 ; U5.12@53974.6,53795.54 53950,53730 ; U5.12@53983.89,53791.25 53950,53730
P01: J1.2 U1.2 U5.11 | length 4940.2
  BottomLayer w10: J1.2@52300,51900 U1.2@52400,51900 52725,51900 52755,51930 52755,52190 52815,52250 53120,52250 53130,52250 53150,52250 53275,52375 53700,52375 53725,52400 53725,52500 53750,52525 54025,52525 54050,52550 U5.11@54050,53800 54050,53730 ; J1.2@52301.77,51885.58 52359.53,51900 ; J1.2@52301.77,51914.42 52359.53,51900 ; J1.2@52305.05,51876 52359.53,51900 ; J1.2@52305.05,51924 52359.53,51900 ; U1.2@52394.46,51874.6 52339,51900 ; U1.2@52394.46,51925.4 52339,51900 ; U1.2@52397.9,51884.14 52339,51900 ; U1.2@52397.9,51915.86 52339,51900 ; U1.2@52399.7,51894.01 52339,51900 ; U1.2@52399.7,51905.99 52339,51900 ; U1.2@52400.3,51894.01 52461,51900 ; U1.2@52400.3,51905.99 52461,51900 ; U1.2@52402.1,51884.14 52461,51900 ; U1.2@52402.1,51915.86 52461,51900 ; U1.2@52405.54,51874.6 52461,51900 ; U1.2@52405.54,51925.4 52461,51900 ; U5.11@54016.11,53791.25 54050,53730 ; U5.11@54025.4,53795.54 54050,53730 ; U5.11@54035.09,53798.39 54050,53730 ; U5.11@54064.91,53798.39 54050,53730 ; U5.11@54074.6,53795.54 54050,53730 ; U5.11@54083.89,53791.25 54050,53730
P02: J1.3 U1.3 U5.10 | length 5075.1
  BottomLayer w10: J1.3@52300,51800 U1.3@52400,51800 52750,51800 52775,51825 52775,52170 52780,52170 52830,52220 53170,52220 53200,52250 53300,52350 53725,52350 53755,52380 53755,52478.28 53775,52498.28 54123.28,52498.28 54150,52525 54150,52600 54150,52725 U5.10@54150,53800 ; J1.3@52301.77,51785.58 52359.53,51800 ; J1.3@52301.77,51814.42 52359.53,51800 ; J1.3@52305.05,51776 52359.53,51800 ; J1.3@52305.05,51824 52359.53,51800 ; U1.3@52394.46,51774.6 52339,51800 ; U1.3@52394.46,51825.4 52339,51800 ; U1.3@52397.9,51784.14 52339,51800 ; U1.3@52397.9,51815.86 52339,51800 ; U1.3@52399.7,51794.01 52339,51800 ; U1.3@52399.7,51805.99 52339,51800 ; U1.3@52400.3,51794.01 52461,51800 ; U1.3@52400.3,51805.99 52461,51800 ; U1.3@52402.1,51784.14 52461,51800 ; U1.3@52402.1,51815.86 52461,51800 ; U1.3@52405.54,51774.6 52461,51800 ; U1.3@52405.54,51825.4 52461,51800 ; U5.10@54116.11,53791.25 54150,53730 ; U5.10@54125.4,53795.54 54150,53730 ; U5.10@54135.09,53798.39 54150,53730 ; U5.10@54164.91,53798.39 54150,53730 ; U5.10@54174.6,53795.54 54150,53730 ; U5.10@54183.89,53791.25 54150,53730
P03: J1.4 U1.4 U5.9 | length 5273.2
  BottomLayer w10: J1.4@52300,51700 U1.4@52400,51700 52775,51700 52800,51725 52800,52140 52840,52180 53110,52180 53183.28,52180 53228.28,52225 53328.28,52325 53750,52325 53775,52350 53775,52450 53800,52475 54225,52475 54250,52500 54250,52700 U5.9@54250,53800 ; J1.4@52301.77,51685.58 52359.53,51700 ; J1.4@52301.77,51714.42 52359.53,51700 ; J1.4@52305.05,51676 52359.53,51700 ; J1.4@52305.05,51724 52359.53,51700 ; U1.4@52394.46,51674.6 52339,51700 ; U1.4@52394.46,51725.4 52339,51700 ; U1.4@52397.9,51684.14 52339,51700 ; U1.4@52397.9,51715.86 52339,51700 ; U1.4@52399.7,51694.01 52339,51700 ; U1.4@52399.7,51705.99 52339,51700 ; U1.4@52400.3,51694.01 52461,51700 ; U1.4@52400.3,51705.99 52461,51700 ; U1.4@52402.1,51684.14 52461,51700 ; U1.4@52402.1,51715.86 52461,51700 ; U1.4@52405.54,51674.6 52461,51700 ; U1.4@52405.54,51725.4 52461,51700 ; U5.9@54216.11,53791.25 54250,53730 ; U5.9@54225.4,53795.54 54250,53730 ; U5.9@54235.09,53798.39 54250,53730 ; U5.9@54264.91,53798.39 54250,53730 ; U5.9@54274.6,53795.54 54250,53730 ; U5.9@54283.89,53791.25 54250,53730
P04: J1.5 U1.5 U5.8 | length 5780.5
  BottomLayer w10: U1.5@52400,51600 52800,51600 52825,51625 52825,52130 52850,52155 53205,52155 53250,52200 53350,52300 53775,52300 53800,52325 53800,52425 53825,52450 54325,52450 54350,52475 54350,52650 U5.8@54350,53800 ; U1.5@52400.3,51594.01 52461,51600 ; U1.5@52400.3,51605.99 52461,51600 ; U1.5@52402.1,51584.14 52461,51600 ; U1.5@52402.1,51615.86 52461,51600 ; U1.5@52405.54,51574.6 52461,51600 ; U1.5@52405.54,51625.4 52461,51600 ; U5.8@54316.11,53791.25 54350,53730 ; U5.8@54325.4,53795.54 54350,53730 ; U5.8@54335.09,53798.39 54350,53730 ; U5.8@54364.91,53798.39 54350,53730 ; U5.8@54374.6,53795.54 54350,53730 ; U5.8@54383.89,53791.25 54350,53730
  BottomLayer w20: J1.5@52298.05,51580.57 U1.5@52388.31,51581.32 ; J1.5@52298.05,51619.43 U1.5@52388.31,51618.68 ; J1.5@52302.13,51580.59 52389.53,51600 J1.5@52302.13,51619.41 ; J1.5@52306.08,51581.44 U1.5@52388.31,51618.68 ; J1.5@52306.08,51618.56 U1.5@52388.31,51581.32 ; U1.5@52397.58,51579.14 52309,51600 U1.5@52397.58,51620.86 ; U1.5@52400,51600 J1.5@52300,51600 ; J1.5@52300,51600 U1.5@52388.31,51618.68 ; J1.5@52300,51600 U1.5@52388.31,51581.32
P05: J1.6 U1.6 | length 1002.6
  BottomLayer w20: J1.6@52298.05,51480.57 U1.6@52388.31,51481.32 ; J1.6@52298.05,51519.43 U1.6@52388.31,51518.68 ; J1.6@52302.13,51480.59 52389.53,51500 J1.6@52302.13,51519.41 ; J1.6@52306.08,51481.44 U1.6@52388.31,51518.68 ; J1.6@52306.08,51518.56 U1.6@52388.31,51481.32 ; U1.6@52397.58,51479.14 52309,51500 U1.6@52397.58,51520.86 ; U1.6@52400,51500 J1.6@52300,51500 ; J1.6@52300,51500 U1.6@52388.31,51518.68 ; J1.6@52300,51500 U1.6@52388.31,51481.32
P06: J1.7 U1.7 | length 704.1
  BottomLayer w10: J1.7@52300,51400 U1.7@52400,51400 ; J1.7@52301.77,51385.58 52359.53,51400 ; J1.7@52301.77,51414.42 52359.53,51400 ; J1.7@52305.05,51376 52359.53,51400 ; J1.7@52305.05,51424 52359.53,51400 ; U1.7@52394.46,51374.6 52339,51400 ; U1.7@52394.46,51425.4 52339,51400 ; U1.7@52397.9,51384.14 52339,51400 ; U1.7@52397.9,51415.86 52339,51400 ; U1.7@52399.7,51394.01 52339,51400 ; U1.7@52399.7,51405.99 52339,51400
P07: J1.8 U1.8 | length 704.1
  BottomLayer w10: J1.8@52300,51300 U1.8@52400,51300 ; J1.8@52301.77,51285.58 52359.53,51300 ; J1.8@52301.77,51314.42 52359.53,51300 ; J1.8@52305.05,51276 52359.53,51300 ; J1.8@52305.05,51324 52359.53,51300 ; U1.8@52394.46,51274.6 52339,51300 ; U1.8@52394.46,51325.4 52339,51300 ; U1.8@52397.9,51284.14 52339,51300 ; U1.8@52397.9,51315.86 52339,51300 ; U1.8@52399.7,51294.01 52339,51300 ; U1.8@52399.7,51305.99 52339,51300
P10: J1.9 J6.1 U1.9 | length 2065
  BottomLayer w10: J6.1@51785.75,51422.06 51849.71,51449.5 ; J6.1@51790.4,51413.08 51849.71,51449.5 ; J6.1@51796.25,51404.94 51849.71,51449.5 ; J6.1@51800,51400 51800.21,51400 51849.71,51449.5 ; J6.1@51800.29,51400.5 51849.71,51449.5 ; J6.1@51804.69,51396.43 51849.71,51449.5 ; J6.1@51812.78,51390.51 51849.71,51449.5 ; J6.1@51821.72,51385.78 51849.71,51449.5 ; 52249.75,51199.75 52000,51449.5 51849.71,51449.5 ; J1.9@52293.98,51176.22 52250,51200 ; J1.9@52293.98,51223.78 52250,51200 ; J1.9@52297.89,51185.63 52250,51200 ; J1.9@52297.89,51214.37 52250,51200 ; J1.9@52301.77,51185.58 52359.53,51200 ; J1.9@52301.77,51214.42 52359.53,51200 ; J1.9@52305.05,51176 52359.53,51200 ; J1.9@52305.05,51224 52359.53,51200 ; U1.9@52394.46,51174.6 52339,51200 ; U1.9@52394.46,51225.4 52339,51200 ; U1.9@52397.9,51184.14 52339,51200 ; U1.9@52397.9,51215.86 52339,51200 ; U1.9@52399.7,51194.01 52339,51200 ; U1.9@52399.7,51205.99 52339,51200 ; U1.9@52400,51200 J1.9@52300,51200 ; 52250,51200 J1.9@52300,51200 ; 52250,51200 J1.9@52300,51200
P11: J1.10 J6.2 U1.10 | length 2020.7
  BottomLayer w10: J6.2@51900,51400 51975,51400 J1.10@52282.5,51092.5 ; J6.2@51900.29,51400.5 51961.29,51400 ; J6.2@51900.53,51394.5 51961.29,51400 ; J6.2@51900.63,51406.49 51961.29,51400 ; J6.2@51902.26,51384.62 51961.29,51400 ; J6.2@51902.52,51416.34 51961.29,51400 ; J6.2@51905.62,51375.05 51961.29,51400 ; J6.2@51906.04,51425.86 51961.29,51400 ; J1.10@52283.96,51081.44 52235.28,51139.72 ; J1.10@52291.25,51088.4 52235.28,51139.72 ; J1.10@52301.77,51085.58 52359.53,51100 ; J1.10@52301.77,51114.42 52359.53,51100 ; J1.10@52305.05,51076 52359.53,51100 ; J1.10@52305.05,51124 52359.53,51100 ; J1.10@52306.38,51113.05 52235.28,51139.72 ; J1.10@52309.29,51122.7 52235.28,51139.72 ; U1.10@52394.46,51074.6 52339,51100 ; U1.10@52394.46,51125.4 52339,51100 ; U1.10@52397.9,51084.14 52339,51100 ; U1.10@52397.9,51115.86 52339,51100 ; U1.10@52399.7,51094.01 52339,51100 ; U1.10@52399.7,51105.99 52339,51100 ; U1.10@52400,51100 J1.10@52300,51100 52235.28,51139.72
P12: J1.11 J6.3 U1.11 | length 2216.3
  BottomLayer w10: J6.3@51785.75,51322.06 51849.71,51349.5 ; J6.3@51790.4,51313.08 51849.71,51349.5 ; J6.3@51796.25,51304.94 51849.71,51349.5 ; J6.3@51800,51300 51800.21,51300 51849.71,51349.5 ; J6.3@51800.29,51300.5 51849.71,51349.5 ; J6.3@51804.69,51296.43 51849.71,51349.5 ; J6.3@51812.78,51290.51 51849.71,51349.5 ; J6.3@51821.72,51285.78 51849.71,51349.5 ; J1.11@52279.31,50986.83 52251.74,51052.98 ; J1.11@52288.32,50991.36 52251.74,51052.98 ; J1.11@52301.77,50985.58 52359.53,51000 ; J1.11@52301.77,51014.42 52359.53,51000 ; J1.11@52302.36,51002.36 51955.21,51349.5 51849.71,51349.5 ; J1.11@52305.05,50976 52359.53,51000 ; J1.11@52305.05,51024 52359.53,51000 ; J1.11@52309.69,51010.82 52251.74,51052.98 ; J1.11@52315.04,51019.38 52251.74,51052.98 ; U1.11@52394.46,50974.6 52339,51000 ; U1.11@52394.46,51025.4 52339,51000 ; U1.11@52397.9,50984.14 52339,51000 ; U1.11@52397.9,51015.86 52339,51000 ; U1.11@52399.7,50994.01 52339,51000 ; U1.11@52399.7,51005.99 52339,51000 ; U1.11@52400,51000 J1.11@52300,51000 52251.74,51052.98
P13: J1.12 J6.4 U1.12 | length 2664
  BottomLayer w10: J6.4@51900,51300 51950,51300 ; J6.4@51900.29,51300.5 51950,51300 ; J6.4@51900.59,51294.51 51950,51300 ; J6.4@51900.71,51306.49 51950,51300 ; J6.4@51902.7,51284.68 51950,51300 ; J6.4@51903.02,51316.26 51950,51300 ; J6.4@51906.83,51275.34 51950,51300 ; J6.4@51907.34,51325.53 51950,51300 ; J1.12@52279.95,50885.88 52249.26,50950.74 ; J1.12@52288.74,50890.82 52249.26,50950.74 ; J1.12@52309.18,50911.26 52249.26,50950.74 ; J1.12@52314.12,50920.05 52249.26,50950.74 ; 51950,51300 52150,51100 52150,51050 J1.12@52300,50900 52249.26,50950.74
  BottomLayer w20: J1.12@52298.05,50880.57 U1.12@52388.31,50881.32 ; J1.12@52298.05,50919.43 U1.12@52388.31,50918.68 ; J1.12@52306.08,50881.44 U1.12@52388.31,50918.68 ; J1.12@52306.08,50918.56 U1.12@52388.31,50881.32 ; U1.12@52397.58,50879.14 J1.12@52309,50900 ; U1.12@52397.58,50920.86 J1.12@52309,50900 ; J1.12@52300,50900 U1.12@52388.31,50881.32 ; J1.12@52300,50900 U1.12@52389.53,50900 ; J1.12@52300,50900 U1.12@52388.31,50918.68 ; J1.12@52300,50900 U1.12@52400,50900 J1.12@52309,50900 ; U1.12@52389.53,50900 52302.13,50880.59 U1.12@52389.53,50900 ; U1.12@52389.53,50900 52302.13,50919.41 U1.12@52389.53,50900
P14: J1.13 J6.5 U1.13 | length 2973.2
  BottomLayer w10: J6.5@51785.75,51222.06 51849.71,51249.5 ; J6.5@51790.4,51213.08 51849.71,51249.5 ; J6.5@51796.25,51204.94 51849.71,51249.5 ; J6.5@51800.21,51200 51849.71,51249.5 ; J6.5@51800.29,51200.5 51849.71,51249.5 ; J6.5@51804.69,51196.43 51849.71,51249.5 ; J6.5@51812.78,51190.51 51849.71,51249.5 ; J6.5@51821.72,51185.78 51849.71,51249.5 ; J1.13@52279.95,50785.88 52249.26,50850.74 ; J1.13@52288.74,50790.82 52249.26,50850.74 ; J1.13@52309.18,50811.26 52249.26,50850.74 ; J1.13@52314.12,50820.05 52249.26,50850.74 ; 51849.71,51249.5 51950,51249.5 52130,51069.5 52130,50970 J1.13@52300,50800 52249.26,50850.74
  BottomLayer w20: J6.5@51800,51200 J6.5@51800.21,51200 ; J1.13@52298.05,50780.57 U1.13@52388.31,50781.32 ; J1.13@52298.05,50819.43 U1.13@52388.31,50818.68 ; J1.13@52306.08,50781.44 U1.13@52388.31,50818.68 ; J1.13@52306.08,50818.56 U1.13@52388.31,50781.32 ; U1.13@52397.58,50779.14 J1.13@52309,50800 ; U1.13@52397.58,50820.86 J1.13@52309,50800 ; J1.13@52300,50800 U1.13@52389.53,50800 ; J1.13@52300,50800 U1.13@52388.31,50818.68 ; J1.13@52300,50800 U1.13@52388.31,50781.32 ; J1.13@52300,50800 U1.13@52400,50800 J1.13@52309,50800 ; U1.13@52389.53,50800 52302.13,50780.59 U1.13@52389.53,50800 ; U1.13@52389.53,50800 52302.13,50819.41 U1.13@52389.53,50800
P15: J1.14 J6.6 U1.14 | length 2332.6
  BottomLayer w10: J6.6@51900,51200 51950,51200 ; J6.6@51900.29,51200.5 51950,51200 ; J6.6@51900.59,51194.51 51950,51200 ; J6.6@51900.71,51206.49 51950,51200 ; J6.6@51902.7,51184.68 51950,51200 ; J6.6@51903.02,51216.26 51950,51200 ; J6.6@51906.83,51175.34 51950,51200 ; J6.6@51907.34,51225.53 51950,51200 ; J1.14@52279.95,50685.88 52249.26,50750.74 ; J1.14@52288.74,50690.82 52249.26,50750.74 ; J1.14@52300,50700 52100,50900 52100,51050 51950,51200 ; J1.14@52309.18,50711.26 52249.26,50750.74 ; J1.14@52314.12,50720.05 52249.26,50750.74
  BottomLayer w20: J1.14@52298.05,50680.57 U1.14@52388.31,50681.32 ; J1.14@52298.05,50719.43 U1.14@52388.31,50718.68 ; J1.14@52302.13,50680.59 52389.53,50700 J1.14@52302.13,50719.41 ; J1.14@52306.08,50681.44 U1.14@52388.31,50718.68 ; J1.14@52306.08,50718.56 U1.14@52388.31,50681.32 ; U1.14@52397.58,50679.14 52309,50700 U1.14@52397.58,50720.86 ; U1.14@52400,50700 J1.14@52300,50700 ; J1.14@52300,50700 U1.14@52388.31,50718.68 ; J1.14@52300,50700 U1.14@52388.31,50681.32